# EAGLE board Telemetry Transceiver Board (EAGLE 8.4.1)
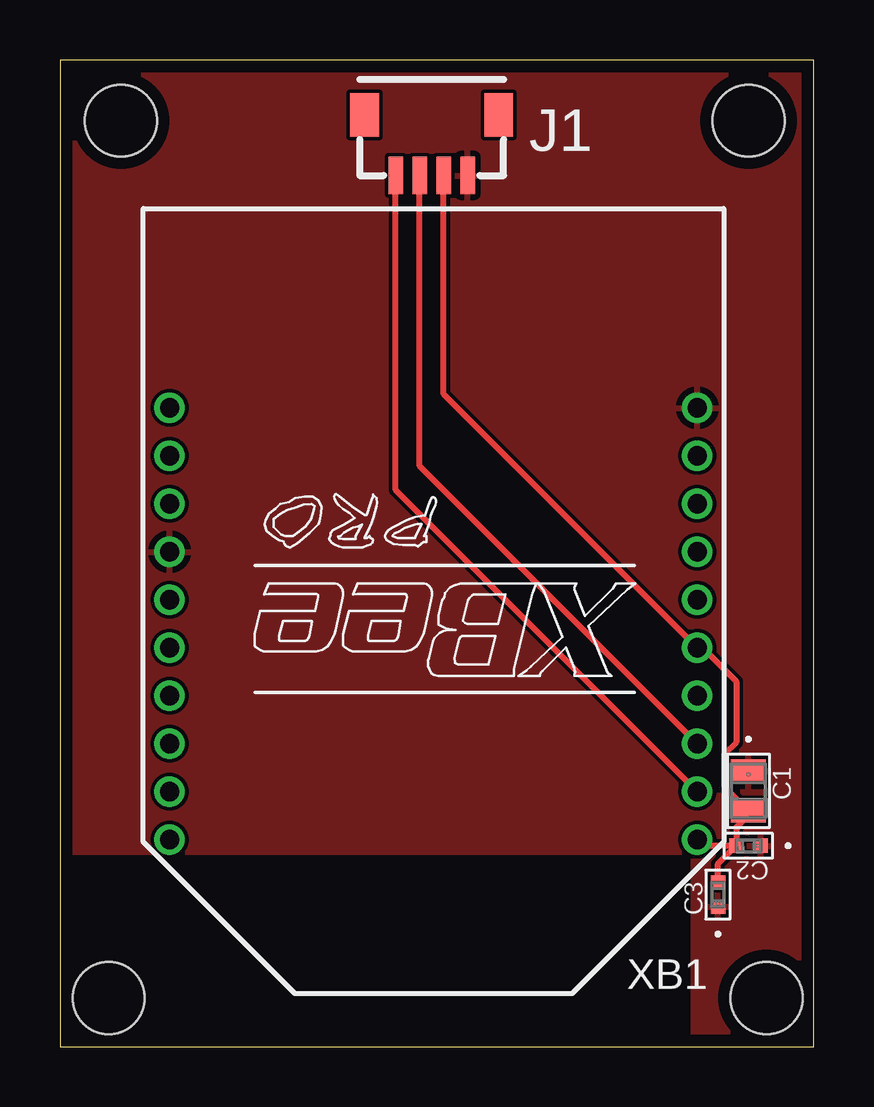
[diagram p0: board, top side]
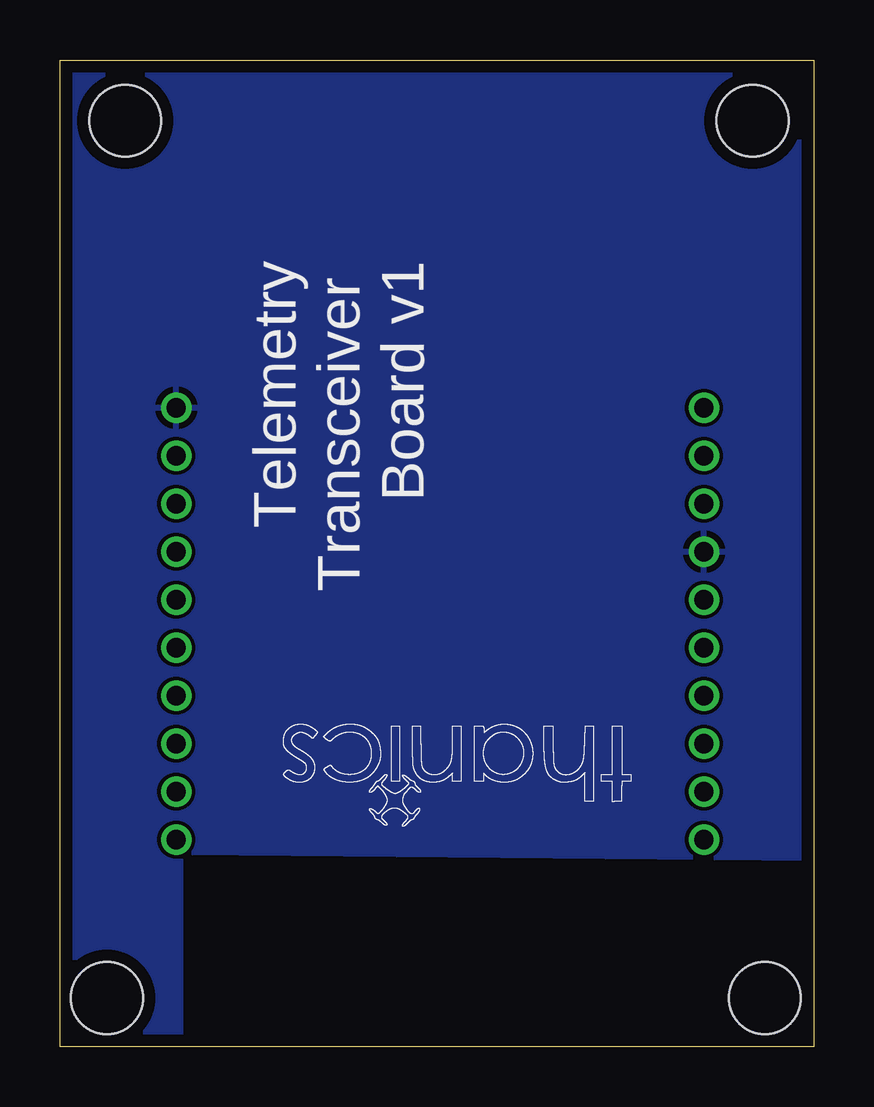
[diagram p1: board, bottom side, seen from below]

Size 31.42 x 41.14 mm. Coordinates in mm from the lower left corner, seen from the top.
Outline: 0,0 31.42,0 31.42,41.14 0,41.14 0,0
Copper layers (1*16): Top 0.035mm / dielectric 1.6mm / Bottom 0.035mm
Design rules "Elecrow_2-layer_PCB_eagle_rule": minimum track width 6mil, minimum drill 12mil, track to track 6mil, track to pad 6mil, pad to pad 6mil, via to via 8mil, smd to smd 0mil, copper to edge 20mil, drill to drill 10mil, minimum pad ring 6mil, minimum via ring 6mil, stop-mask expansion 0mil, vias tented up to drill 100mil, thermal gap 10mil
Holes 3 mm at 2.54,38.61 28.7,38.61 29.46,2.03 2.03,2.03
tRestrict: area 0,0 to 26.2,7.9
bRestrict: area 0,0 to 26.2,7.9

## Footprints (pad centres in the part's own frame; a part is rotated, then mirrored left to right if it is on the bottom)
YAG_CC0805 = smd 0.965 x 1.448: 1 -0.826,0; 2 0.826,0
G-155-M = smd 0.559 x 0.61: 1 -0.521,0; 2 0.521,0
JST_SH_4POS = smd 0.6 x 1.55: 1 -1.5,0; 2 -0.5,0; 3 0.5,0; 4 1.5,0 | smd 1.2 x 1.8: P$5 -2.8,2.525; P$6 2.8,2.525
XBEE-PRO = drill 0.8 pad 1.27: 1 -11,9; 2 -11,7; 3 -11,5; 4 -11,3; 5 -11,1; 6 -11,-1; 7 -11,-3; 8 -11,-5; 9 -11,-7; 10 -11,-9; 11 11,-9; 12 11,-7; 13 11,-5; 14 11,-3; 15 11,-1; 16 11,1; 17 11,3; 18 11,5; 19 11,7; 20 11,9

## Placement (x,y rotation side)
C1  1uF  [YAG_CC0805]  28.7,10.67 270 top
C2  16pF  [G-155-M]  28.7,8.38 180 top
C3  16pF  [G-155-M]  27.43,6.35 90 top
J1  [JST_SH_4POS]  15.49,36.32 0 top
XB1  XBEE-PRO  [XBEE-PRO]  15.57,17.64 180 top

## Library data of the parts
C1 = Telemetry Transceiver Board; COPYRIGHT: Copyright C 2015 Accelerated Designs. All rights reserved; MANUFACTURER_PART_NUMBER: CC0805KKX7R7BB105; VENDOR: Vendor
C2 C3 = Telemetry Transceiver Board; MANUFACTURER_PART_NUMBER: GRM1555C1H160JA01D; VENDOR: Murata
J1 = thanics_robotics
XB1 = xbee; MPN: XBP24-AWI-001; OC_FARNELL: 1337916; OC_NEWARK: 42M2667

## Nets
+3V3: C1.2 C2.2 C3.2 J1.3 XB1.1 XB1.5
GND: C1.1 C2.1 C3.1 J1.4 XB1.10 XB1.14
RX: J1.2 XB1.3
TX: J1.1 XB1.2

## Tracks (layer width: path | path; a pad name or v marks a point on that pad's centre or on a via)
+3V3
  Top 0.254: C2.2 28.19,8.39 28.19,9.14 28.7,9.65 C1.2 27.69,10.86 27.69,12.19 28.19,12.7 28.19,15.24 26.8,16.64 XB1.5 15.99,27.21 J1.3 | C3.2 27.43,7.63 C2.2 | C2.2 26.83,8.38 XB1.1
GND
  pour Top: 0,41.15 31.5,41.15 31.5,0 0,0
  pour Bottom: 0,41.15 31.5,41.15 31.5,0 0,0
RX
  Top 0.254: XB1.3 14.99,24.21 J1.2
TX
  Top 0.254: XB1.2 13.99,23.21 J1.1

## Text on the board
tPlace: J1
bPlace: Telemetry / Transceiver / Board v1